# Altium PCB PCB_OPLL+DCSG MegaMod copy_2021-11-02.pcbdoc
Units mil, origin at the board's own origin, x right, y up, seen from the top; angles counter-clockwise.
Board outline 4470 x 3305 mil, 2 copper layers (Top Layer, Bottom Layer); 22 components, 30 nets, 147 pads, 13 vias.
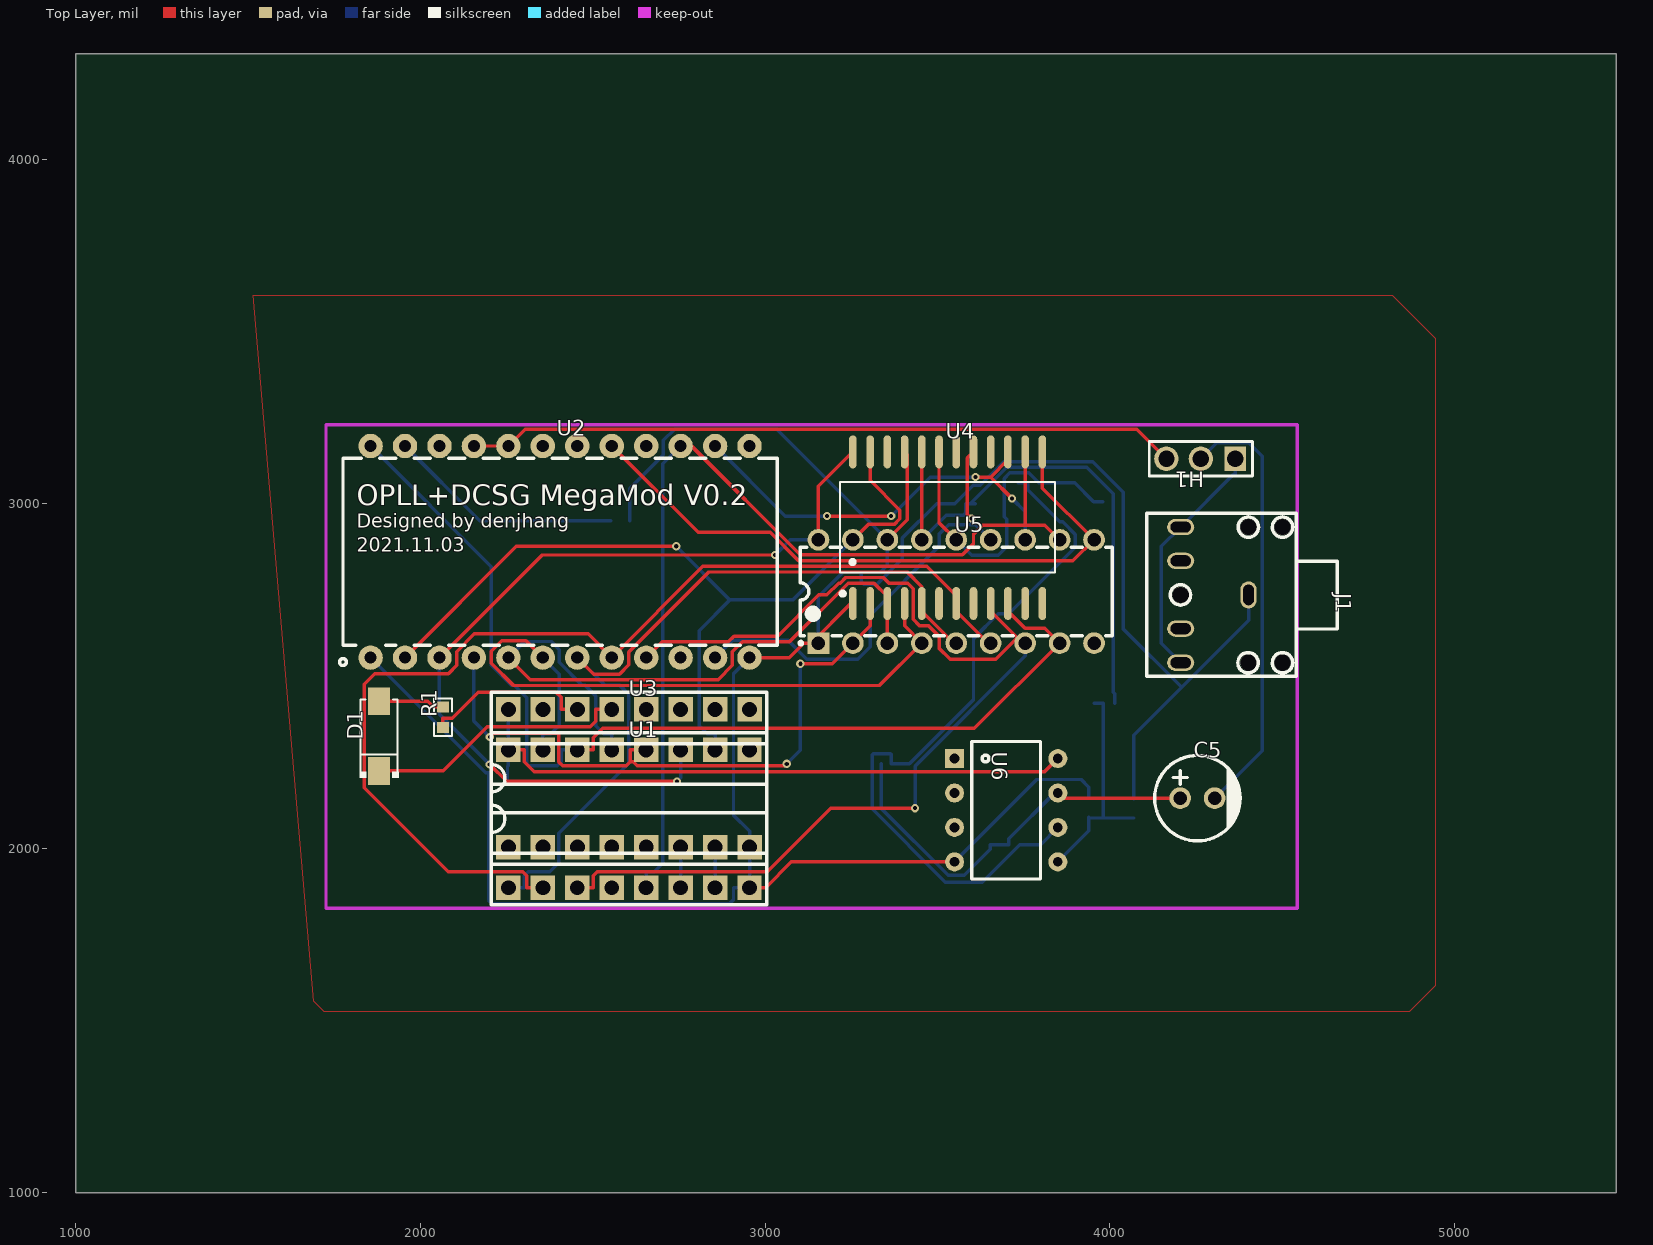
[diagram p0: Top Layer view]
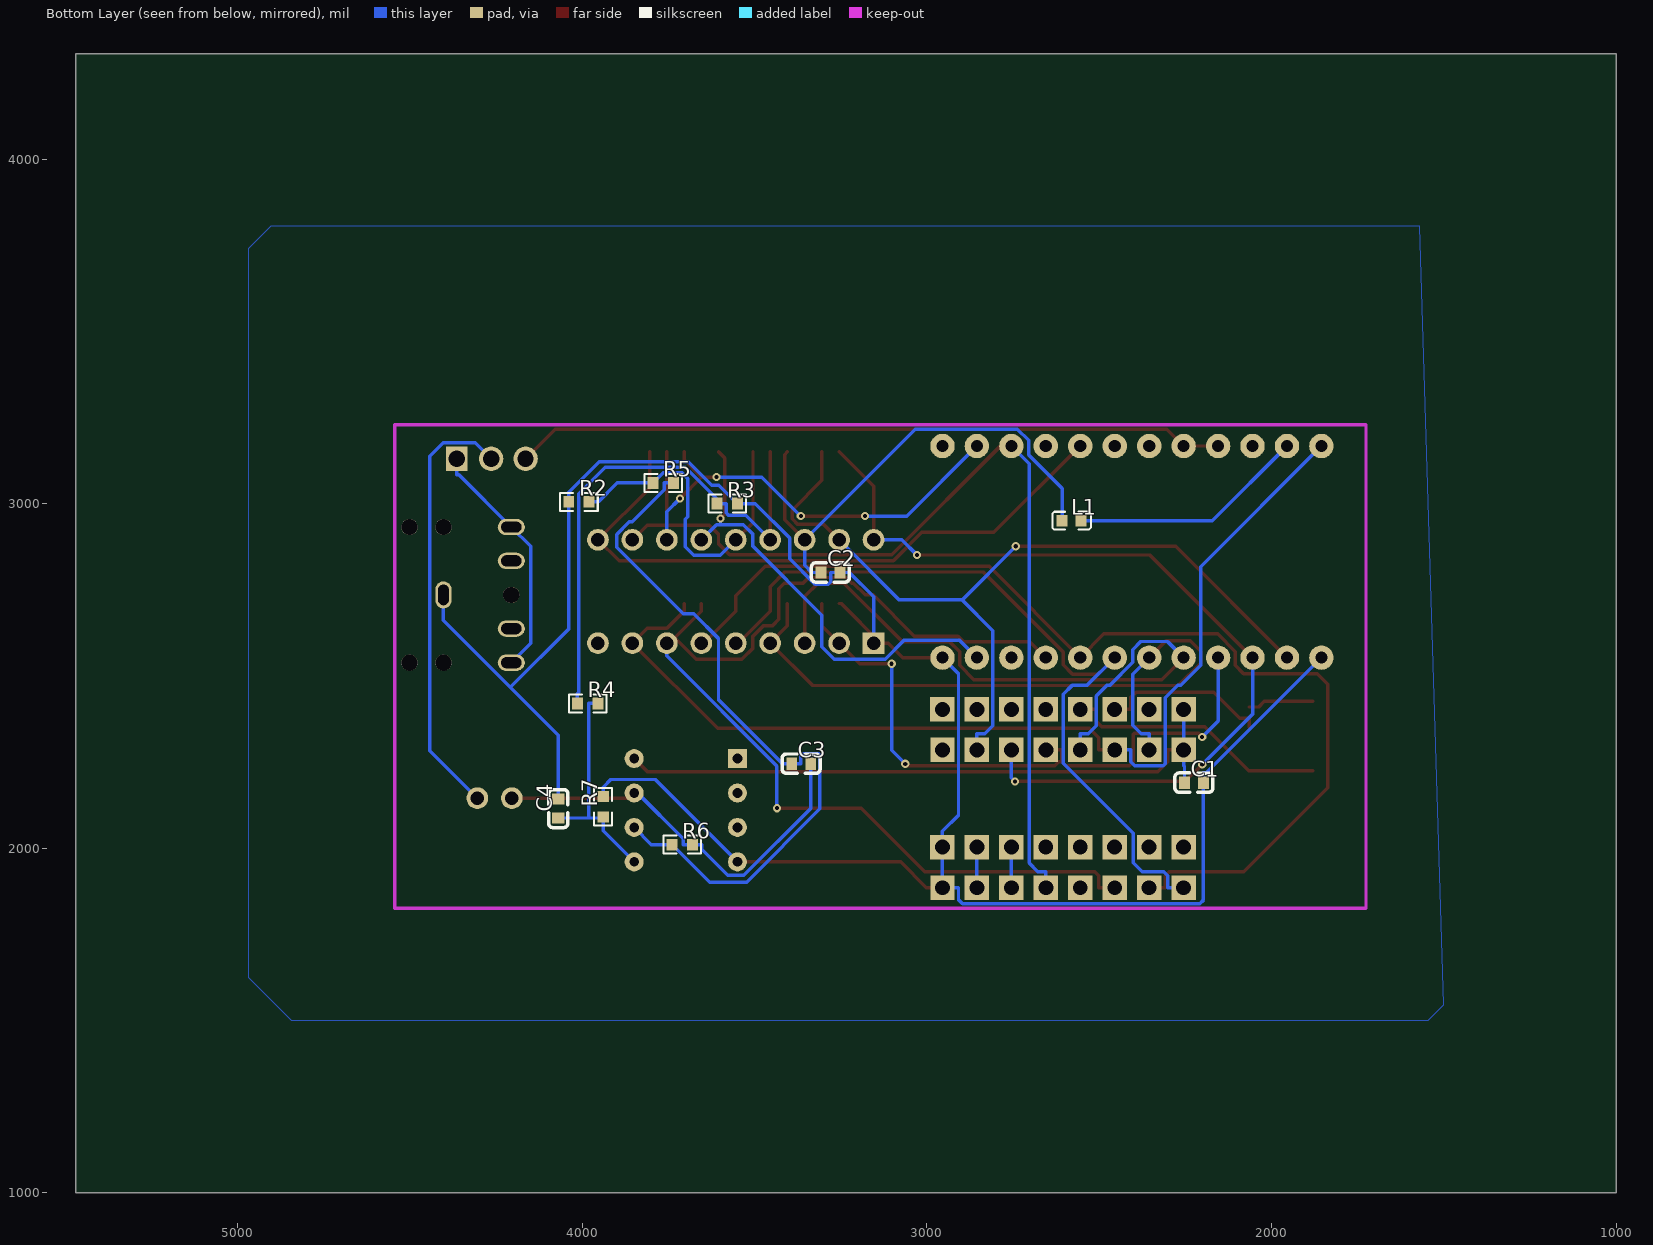
[diagram p1: Bottom Layer view, seen from below]

## Layer stack, top to bottom
Top Layer: signal copper (thickness not stored)
Dielectric: dielectric 12.6, FR-4, Dk 4.8
Bottom Layer: signal copper (thickness not stored)

## Board outline
5470,1000 1000,1000 1000,4305 5470,4305

## Components (designator, comment, footprint, x,y, rotation, side; value= is the part's Value field where it differs from the comment)
C1 "0.1u" C0603 2225,2190 r0 bottom
C2 "0.1u" C0603 3280,2800 r0 bottom
C3 "220p" C0603 3365,2245 r0 bottom
C4 "220p" C0603 4070,2115 r270 bottom
C5 "4.7uF" CAP-TH_BD6.3-P2.50-D1.0-FD 4255,2145 r0 top
D1 "SS14" SMA_L4.4-W2.8-LS5.4-RD 1880,2325 r90 top
H1 "Header-Male-2.54_1x3" HDR-TH_3P-P2.54-V-M-1 4265,3130 r180 top
J1 "PJ-307C" AUDIO-TH_PJ307C 4305,2735 r270 top
L1 "100Ω" L0603 2580,2950 r0 bottom
R1 "1k" R0603#1 2065,2380 r90 top
R2 "2.2k" R0603#2 4010,3005 r0 bottom
R3 "2.2k" R0603#2 3580,3000 r0 bottom
R4 "5.1k" R0603#2 3985,2420 r0 bottom
R5 "5.1k" R0603#2 3765,3060 r0 bottom
R6 "82k" R0603#2 3710,2010 r0 bottom
R7 "82k" R0603#2 3940,2120 r270 bottom
U1 "SN76489" DIP-16_L20.3-W10.2-P2.54-LS10.2-BL 2605,2085 r0 top
U2 "MegaGRRL IC-FM" DIP-24_L32.0-W13.8-P2.54-LS15.6-BL 2405,2860 r0 top
U3 "MegaGRRL IC PSG" DIP-16_L20.3-W10.2-P2.54-LS10.2-BL 2605.1,2202.8 r0 top
U4 "YM2413-F" SOIC24-YMF276 3505,2950 r0 top
U5 "YM2413" DIP-18_L23.0-W6.5-P2.54-LS7.6-BL 3555,2745 r0 top
U6 "SA5532AP" DIP8 3700,2110 r270 top

## Footprints (in the part's own frame and the unit in brackets; to place one, negate y for a bottom-side part, rotate by r counter-clockwise, add the part's x,y. Pads: shape width x height; smd on the part's side, far side on the other; paste and mask are expansions set on the pad)
AUDIO-TH_PJ307C [mm]
  oval 2x1.2 hole 0.8 slot 1.5 at 0 deg: 1(0,2.5)
  oval 1.2x2 hole 0.8 slot 1.5 at 90 deg: 2(5,-2.5) 3(2.489,-2.5) 4(-2.511,-2.5) 5(-5,-2.5)
  round 1.2 hole 1.2 unplated: ""(-5,2.5) ""(-5,5) ""(0,-2.5) ""(5,2.5) ""(5,5)
  silkscreen extent -6.01,-4.99 5.99,9.03
C0603 [mm]
  rect 0.8x0.9 smd: 1(0.7,0) 2(-0.7,0)
  silkscreen extent -1.39,-0.72 1.41,0.71
CAP-TH_BD6.3-P2.50-D1.0-FD [mm]
  round 1.6 hole 1: 1(-1.27,0) 2(1.27,0)
  silkscreen extent -3.15,-3.15 3.17,3.15
DIP8 [mil]
  rect 55x55 hole 28: 1(-150,-150)
  round 55 hole 28: 2(-50,-150) 3(50,-150) 4(150,-150) 5(150,150) 6(50,150) 7(-50,150) 8(-150,150)
  silkscreen extent -200,-100 200,100
DIP-16_L20.3-W10.2-P2.54-LS10.2-BL [mm]
  rect 1.8x1.8 hole 1.1: 1(-8.89,-5.08) 2(-6.35,-5.08) 3(-3.81,-5.08) 4(-1.27,-5.08) 5(1.27,-5.08) 6(3.81,-5.08) 7(6.35,-5.08) 8(8.89,-5.08) 9(8.89,5.08) 10(6.35,5.08) 11(3.81,5.08) 12(1.27,5.08) 13(-1.27,5.08) 14(-3.81,5.08) 15(-6.35,5.08) 16(-8.89,5.08)
  silkscreen extent -10.16,-6.33 10.16,6.33
DIP-18_L23.0-W6.5-P2.54-LS7.6-BL [mm]
  rect 1.6x1.6 hole 1: 1(-10.16,-3.81)
  round 1.6 hole 1: 2(-7.62,-3.81) 3(-5.08,-3.81) 4(-2.54,-3.81) 5(0,-3.81) 6(2.54,-3.81) 7(5.08,-3.81) 8(7.62,-3.81) 9(10.16,-3.81) 10(10.16,3.81) 11(7.62,3.81) 12(5.08,3.81) 13(2.54,3.81) 14(0,3.81) 15(-2.54,3.81) 16(-5.08,3.81) 17(-7.62,3.81) 18(-10.16,3.81)
  silkscreen extent -11.58,-3.93 11.5,3.25
DIP-24_L32.0-W13.8-P2.54-LS15.6-BL [mm]
  round 1.8 hole 0.9: 1(-13.97,-7.8) 2(-11.43,-7.8) 3(-8.89,-7.8) 4(-6.35,-7.8) 5(-3.81,-7.8) 6(-1.27,-7.8) 7(1.27,-7.8) 8(3.81,-7.8) 9(6.35,-7.8) 10(8.89,-7.8) 11(11.43,-7.8) 12(13.97,-7.8) 13(13.97,7.8) 14(11.43,7.8) 15(8.89,7.8) 16(6.35,7.8) 17(3.81,7.8) 18(1.27,7.8) 19(-1.27,7.8) 20(-3.81,7.8) 21(-6.35,7.8) 22(-8.89,7.8) 23(-11.43,7.8) 24(-13.97,7.8)
  silkscreen extent -16.26,-8.38 16,6.9
HDR-TH_3P-P2.54-V-M-1 [mm]
  rect 1.575x1.8 hole 1.2: 1(-2.54,0)
  round 1.8 hole 1.2: 2(0,0) 3(2.54,0)
  silkscreen extent -3.81,-1.27 3.81,1.27
L0603 [mm]
  rect 0.8x0.864 smd: 1(-0.7,0) 2(0.7,0)
  silkscreen extent -1.41,-0.67 1.42,0.65
R0603#1 [mil]
  rect 31.75x34.02 smd: 1(-29.66,0) 2(29.66,0)
  silkscreen extent -55,-26 55,26
R0603#2 [mil]
  rect 31.75x34.02 smd: 1(29.66,0) 2(-29.66,0)
  silkscreen extent -55,-26 55,26
SMA_L4.4-W2.8-LS5.4-RD [mm]
  rect 2.046x1.62 smd: 1(-2.566,0) 2(2.565,0)
  silkscreen extent -3.08,-1.44 2.7,1.44
SOIC24-YMF276 [mil]
  oval 22.05x95.74 smd: 1(-250,-240) 2(-200,-240) 3(-150,-240) 4(-100,-240) 5(-50,-240) 6(0,-240) 7(50,-240) 8(100,-240) 9(150,-240) 10(200,-240) 11(250,-240) 12(300,-240) 13(300,200) 14(250,200) 15(200,200) 16(150,200) 17(100,200) 18(50,200) 19(0,200) 20(-50,200) 21(-100,200) 22(-150,200) 23(-200,200) 24(-250,200)
  silkscreen extent -288,-217 336,112

## Via types
v1: diameter 24.02, hole 12.01, Top Layer to Bottom Layer, 13 vias

## Nets (pads, with @x,y where several pads share a name; then routed paths per layer and width w, separated by ;. In a path a pad name is that pad's centre, name@x,y a point inside that pad or via, vN(x,y) a via of type N, cw(c..) or ccw(c..) an arc to the next point about the centre after c; other vN are vias at no path point)
+5V: L1.1 U2.23 | length 687.4
  Bottom Layer w10: U2.23 2172.09,2950 L1.1
/CS: U2.14 U4.15 U5.12 | length 1248.1
  Top Layer w10: v1@3179.71,2963.85 v1@3365.98,2963.85 ; v1(3611.01,3076.9) 3654.72,3076.9 ; U4.15 3705,3127.18 3654.72,3076.9 ; v1(3716.88,3014.74) 3654.72,3076.9
  Bottom Layer w10: U2.14 3058.24,2963.85 v1@3179.71,2963.85 ; v1@3365.98,2963.85 3479.03,3076.9 v1(3611.01,3076.9) ; v1(3716.88,3014.74) 3755,2976.62 U5.12
  other v1: 3179.71,2963.85 3365.98,2963.85
/IC: U2.11 U4.17 U5.13 | length 1320.2
  Top Layer w10: v1(3599.33,2957) 3587.28,2969.05 3587.28,3132.28 U4.17
  Bottom Layer w10: U2.11 2904.8,2602.71 3067.62,2602.71 3121.61,2548.72 3269.57,2548.72 3305.01,2584.16 3305.01,2676.22 3505.02,2876.23 3505.02,2910.58 3533.57,2939.13 3599.33,2939.13 ; v1(3599.33,2957) 3599.33,2939.13 ; U5.13 3610.87,2939.13 3599.33,2939.13
/OE: U1.6 U3.6 | length 117.8
  Bottom Layer w10: U1.6 2755,1931.5 2755.1,1931.6 U3.6
/WR: U1.5 U2.15 U4.14 U5.11 | length 2849.4
  Top Layer w10: U2.15 2786.59,3167.09 3102.16,2851.52 3573.18,2851.52 3605.02,2883.36 3605.02,2910.47 3632.12,2937.57 3755,2937.57 ; U4.14 3755,2937.57 ; U5.11 3812.43,2937.57 3755,2937.57
  Bottom Layer w10: U1.5 2655,1931.5 2678.25,1931.5 2703.58,1956.83 2703.58,3115.67 U2.15
A0: U2.17 U4.13 U5.10 | length 1880.6
  Top Layer w10: U2.17 2805.78,2916.31 3014.61,2916.31 3097.24,2833.68 3893.68,2833.68 U5.10 3805,3045 U4.13
A.VCC: C1.1 U1.16 U3.16 U6.8 | length 1871.7
  Top Layer w10: U1.16 2301.5,2285 2301.5,2250.12 2330.38,2221.24 3811.24,2221.24 U6.8
  Bottom Layer w10: C1.1 2252.56,2236.06 2255,2238.5 U1.16 2255,2356.2 2255.1,2356.3 U3.16
C5_2: C5.2 H1.2 | length 1262.7
  Bottom Layer w10: H1.2 4311.51,3176.51 4403.44,3176.51 4442.97,3136.98 4442.97,2282.97 C5.2
D0: U1.10 U2.2 U4.23 U5.17 | length 2467.8
  Top Layer w10: U2.2 2278.22,2876.13 v1(2742.19,2876.13) ; U5.17 3299.4,2939.4 3375.17,2939.4 3391.51,2955.74 3391.51,2981 3305,3067.51 U4.23
  Bottom Layer w10: v1(2742.19,2876.13) 2898.06,2720.26 ; U1.10 2855,2331.5 2831.74,2331.5 2808.5,2354.74 2808.5,2630.7 2898.06,2720.26 ; U5.17 3080.26,2720.26 2898.06,2720.26
D1: U1.11 U2.3 U4.24 U5.18 | length 2568.5
  Top Layer w10: U2.3 2352.83,2850.74 v1(3028.95,2850.74) ; v1(2200.99,2242.7) 2250.15,2193.54 v1(2744.5,2193.54) ; U5.18 3155,3050 U4.24
  Bottom Layer w10: U2.3 2055,2388.69 v1(2200.99,2242.7) ; v1(2744.5,2193.54) 2755,2204.04 U1.11 ; v1(3028.95,2850.74) 3073.21,2895 U5.18
D1_2: D1.2 R1.2 | length 191.8
  Top Layer w10: D1.2 2020.58,2426 2036.92,2409.66 R1.2
D2: U1.12 U2.4 U4.2 U5.2 | length 1914.9
  Top Layer w10: v1(2201.35,2322.57) 2211.71,2332.93 2398.58,2332.93 2401.51,2330 2401.51,2249.93 2412.94,2238.5 2596.88,2238.5 2608.5,2250.12 ; U1.12 2608.5,2285 2608.5,2250.12 ; v1@3062.85,2244.55 3056.79,2238.49 2629.11,2238.49 2617.48,2250.12 2608.5,2250.12 ; v1(3102.47,2535.21) 3195.21,2535.21 U5.2 3305,2645 U4.2
  Bottom Layer w10: U2.4 2155,2368.92 v1(2201.35,2322.57) ; v1@3062.85,2244.55 3102.47,2284.17 v1(3102.47,2535.21)
  other v1: 3062.85,2244.55
D3: U1.13 U2.5 U4.3 U5.3 | length 1967
  Top Layer w10: U2.5 2319.03,2488.88 2863.7,2488.88 2905,2530.18 2905,2569.84 2934.58,2599.42 3071.05,2599.42 3240.95,2769.32 3316.32,2769.32 3355,2730.64 U4.3 U5.3
  Bottom Layer w10: U2.5 2301.75,2599.66 2379.36,2599.66 2402.8,2576.22 2402.8,2539.35 2470.03,2472.12 2477.98,2472.12 2508.5,2441.6 2508.5,2354.74 2531.74,2331.5 2555,2331.5 U1.13
D4: U1.15 U2.6 U4.4 U5.4 | length 2001.5
  Top Layer w10: U2.6 2306.25,2601.66 2235.81,2601.66 2205,2570.85 2205,2536.96 2269.91,2472.05 3332.05,2472.05 U5.4 3405,2645 U4.4
  Bottom Layer w10: U1.15 2355,2331.5 2378.25,2331.5 2402.82,2356.07 2402.82,2505.09 U2.6
D5: U1.1 U2.7 U4.5 U5.5 | length 2355.8
  Top Layer w10: U2.7 2502.83,2505.08 2577.56,2505.08 2604.23,2531.75 2604.23,2569.3 2836.43,2801.5 3412.63,2801.5 3455,2759.13 U4.5 3455,2687.62 3547.62,2595 U5.5
  Bottom Layer w10: U1.1 2301.5,1885 2301.5,1919.88 2313.12,1931.5 2375.32,1931.5 2401.61,1957.79 2401.61,2043.34 2604.81,2246.54 2604.81,2446.24 2578.93,2472.12 2535.79,2472.12 U2.7
D6: U1.2 U2.8 U4.7 U5.6 | length 3117.1
  Top Layer w10: U1.2 2308.5,1885 2308.5,1919.88 2296.88,1931.5 2081.09,1931.5 1837.03,2175.56 1837.03,2475.89 1867.54,2506.4 2081.13,2506.4 2105,2530.27 2105,2570.07 2156.55,2621.62 2486.29,2621.62 U2.8 2819.68,2817.59 3469.53,2817.59 3555,2732.12 U4.7 3555,2687.62 3647.62,2595 U5.6
D7: U1.3 U2.9 U4.9 U5.7 | length 3238.6
  Top Layer w10: U1.3 2501.5,1885 2501.5,1919.88 2513.12,1931.5 3006.73,1931.5 3191.19,2115.96 v1(3435.51,2115.96) ; U2.9 2701.51,2599.42 2893.77,2599.42 2909.86,2615.51 3037.09,2615.51 3156.39,2734.81 3179.15,2734.81 3213.66,2769.32 3218.18,2769.32 3234.27,2785.41 3343.61,2785.41 3359.7,2769.32 3413.79,2769.32 3430,2753.11 3430,2663.89 3447.84,2646.05 3473.8,2646.05 3505.02,2614.83 3505.02,2580.5 3537.19,2548.33 3670.24,2548.33 U5.7@3732.27,2610.36 ; U4.9 3655,2687.62 U5.7@3732.27,2610.36 ; U5.7 3747.62,2595 U5.7@3732.27,2610.36
  Bottom Layer w10: v1(3435.51,2115.96) 3435.51,2238.36 3755,2557.85 U5.7
GND: C1.2 C2.2 C4.2 J1.1 R2.1 R3.2 R7.2 U1.8 U2.1 U2.12 U3.8 U4.1 U5.1 U6.4 | length 6561
  Top Layer w10: U1.8 3001.5,1885 3076.5,1960 U6.4 ; U2.12 3070.34,2552.91 3112.43,2595 U5.1@3133.72,2595 ; U5.1 U5.1@3133.72,2595 ; U4.1 3248.72,2710 U5.1@3133.72,2595
  Bottom Layer w10: U2.1 2189.12,2218.79 2197.44,2218.79 2197.44,2204.4 C1.2 2197.44,1849.47 2208.41,1838.5 2896.88,1838.5 2908.5,1850.12 2908.5,1885 U1.8 2955,1956.2 2955.1,1956.3 U3.8 2955.1,2049.3 2908.49,2095.91 2908.49,2506.4 U2.12 ; U5.1 3155,2729.38 3225.62,2800 C2.2 3279.26,2800 3279.26,2773.18 3286.36,2766.08 3324.88,2766.08 3398.18,2839.38 3398.18,2900.12 3498.06,3000 R3.2 3604.16,3053.82 3625.16,3053.82 3692.93,3121.59 3951.15,3121.59 4039.66,3033.08 R2.1 4039.66,2635.91 4209.01,2466.57 ; U6.4 3789.19,2199.19 3917.41,2199.19 3940,2176.6 R7.2 ; C4.2 4070,2327.56 4209.01,2466.57 ; J1.1 4403.43,2660.99 4209.01,2466.57
IN.L: H1.3 U2.20 U2.21 | length 2066.1
  Top Layer w10: U2.21 U2.20 2304.23,3216.32 4078.68,3216.32 H1.3
MCLK: U1.14 U2.24 U4.10 U5.8 | length 3063
  Top Layer w10: U1.14 2501.5,2285 2501.5,2319.88 2529.21,2347.59 3607.59,2347.59 U5.8 3811.39,2638.61 3754.64,2638.61 3705,2688.25 U4.10
  Bottom Layer w10: U2.24 2205,2817.09 2205,2531.33 2263.65,2472.68 2272.04,2472.68 2308.5,2436.22 2308.5,2244.99 2314.99,2238.5 2396.88,2238.5 2408.5,2250.12 2408.5,2285 U1.14
MO: R2.2 R5.1 U4.19 U5.14 | length 981.1
  Top Layer w10: U4.19 3505,2945 U5.14
  Bottom Layer w10: U5.14 3600.19,2849.81 3676.44,2849.81 3701.87,2875.24 3701.87,2954.27 3693.8,2962.34 3693.8,3072.78 3710.43,3089.41 3765.25,3089.41 R5.1 3898.4,3060 3953.4,3005 R2.2
OUT.L: H1.1 J1.2 J1.5 | length 707.9
  Bottom Layer w10: J1.2 4150.45,2594.28 4150.45,2875.72 4206.58,2931.85 4358.23,3083.5 4365,3083.5 H1.1
PSG_SND: U1.7 U3.7 | length 117.8
  Bottom Layer w10: U1.7 2855,1931.5 2855.1,1931.6 U3.7
R6_1: C3.1 R5.2 R6.1 U6.6 | length 2109
  Bottom Layer w10: R5.2 3762.29,3060 3762.29,3040.71 3855.86,2947.14 3863.53,2947.14 3900.49,2910.18 3900.49,2872.7 3707.72,2679.93 3676.52,2679.93 3605.02,2608.43 3605.02,2430.64 3419.38,2245 C3.1 3365.74,2245 3365.74,2271.82 3363.76,2273.8 3313.54,2273.8 3310.61,2270.87 3310.61,2113.89 3523.1,1901.4 3631.06,1901.4 R6.1 3800,2010 U6.6
R6_2: C3.2 C5.1 R6.2 U6.7 | length 1201.2
  Top Layer w10: U6.7 3865,2145 C5.1
  Bottom Layer w10: C3.2 3337.44,2114.93 3531.56,1920.81 3577.68,1920.81 3653.4,1996.53 3653.4,2010 R6.2 3707.29,2010 3707.29,2027.12 3840.17,2160 U6.7
R7_1: C4.1 R4.2 R7.1 U6.5 | length 657.1
  Bottom Layer w10: U6.5 3940,2050 R7.1@3940,2087.44 ; R7.1 R7.1@3940,2087.44 ; R4.2 3982.29,2420 3982.29,2087.44 ; C4.1 4041.21,2087.44 3982.29,2087.44 ; R7.1@3940,2087.44 3982.29,2087.44
RO: R3.1 R4.1 U4.20 U5.15 | length 1569.1
  Top Layer w10: U5.15 U4.20
  Bottom Layer w10: U5.15 3526.47,2966.47 3576.13,2966.47 3582.71,2973.05 3582.71,3000 R3.1@3596.19,3000 ; R3.1 R3.1@3596.19,3000 ; R4.1 4014.66,2448.08 4010.57,2452.17 4010.57,3028.47 3933.54,3105.5 3701.69,3105.5 R3.1@3596.19,3000
U3_13: D1.1 U3.13 | length 769.6
  Top Layer w10: D1.1 2066.07,2224 2194.02,2351.95 2492.63,2351.95 2508.6,2367.92 2508.6,2402.8 U3.13
U3_14: R1.1 U3.14 | length 489.6
  Top Layer w10: R1.1 2065,2377.29 2091.95,2377.29 2167.66,2453 2393.27,2453 2408.6,2437.67 2408.6,2402.8 U3.14
VCC: C2.1 L1.2 U4.21 U5.16 | length 1483.3
  Top Layer w10: U5.16 3413.04,2953.04 3413.04,3141.96 U4.21
  Bottom Layer w10: L1.2 2607.56,3043.7 2705,3141.14 2705,3183.45 2737.87,3216.32 3033.68,3216.32 U5.16 3355,2820.62 3334.38,2800 C2.1
pads on no net: J1. J1.3 J1.4 U1.4 U1.9 U2.10 U2.13 U2.16 U2.18 U2.19 U2.22 U3.1 U3.2 U3.3 U3.4 U3.5 U3.9 U3.10 U3.11 U3.12 U3.15 U4.6 U4.8 U4.11 U4.12 U4.16 U4.18 U4.22 U5.9 U6.1 U6.2 U6.3

## Polygon pours and split planes (outlines as drawn)
GND on Bottom Layer (solid): 1570,3805 4905,3805 4970,3740 4970,1625 4845,1500 1545,1500 1500,1545
GND on Top Layer (solid): 1515,3605 4820,3605 4945,3480 4945,1600 4870,1525 1720,1525 1690,1555

## Silkscreen, mask and mechanical layers (free items; w line width, h text height)
Top Overlay:
  text "OPLL+DCSG MegaMod V0.2" at 1815,2995.47 h59.05
  text "Designed by denjhang" at 1815,2929.68 h40.63
  text "2021.11.03" at 1815,2859.68 h40.63